# Altium PCB PCB2.PcbDoc
Units mil, origin at the board's own origin, x right, y up, seen from the top; angles counter-clockwise.
Board outline 2860 x 2955 mil, 2 copper layers (Top Layer, Bottom Layer); 7 components, 13 nets, 64 pads, 4 vias.
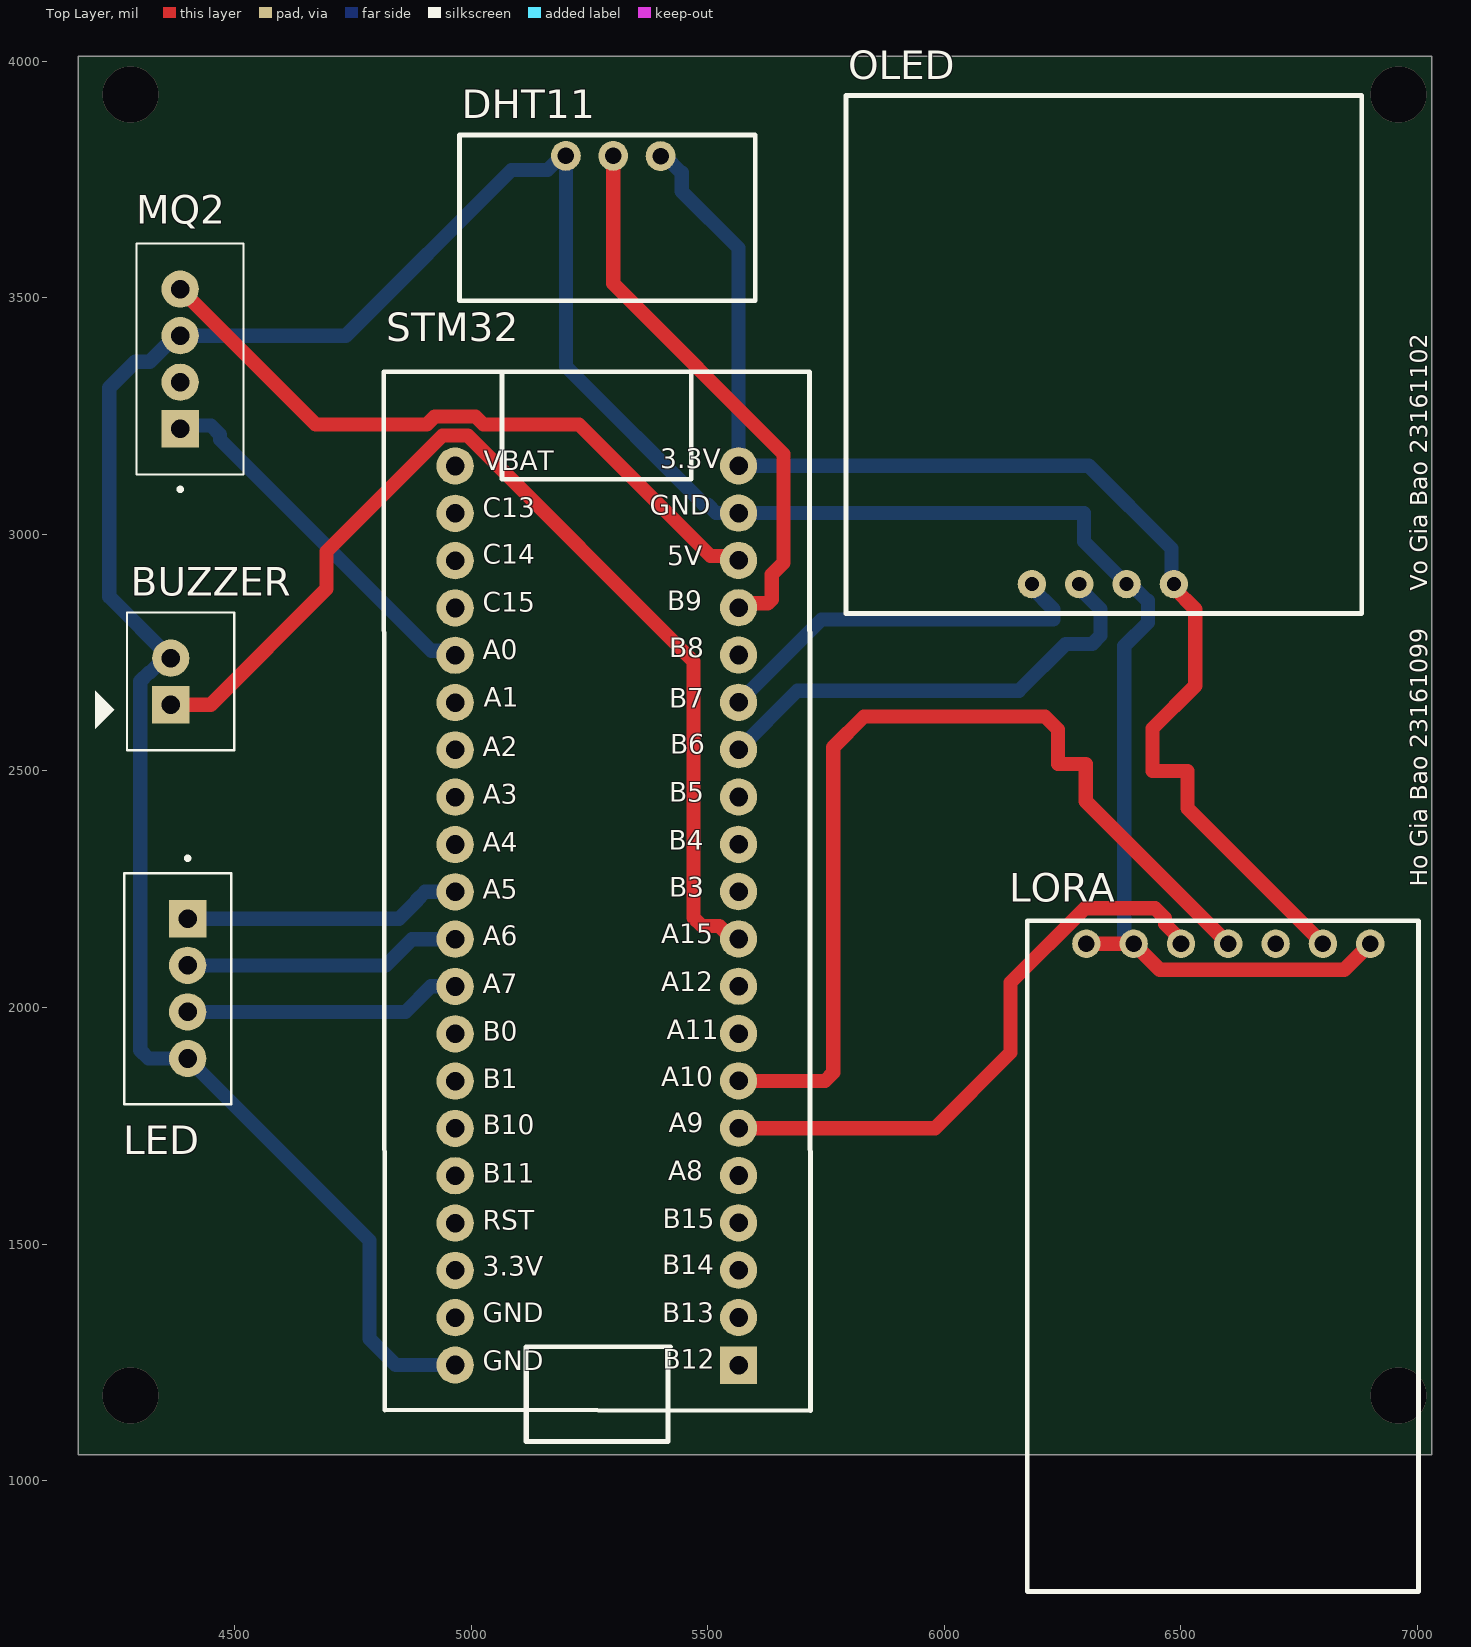
[diagram p0: Top Layer view]
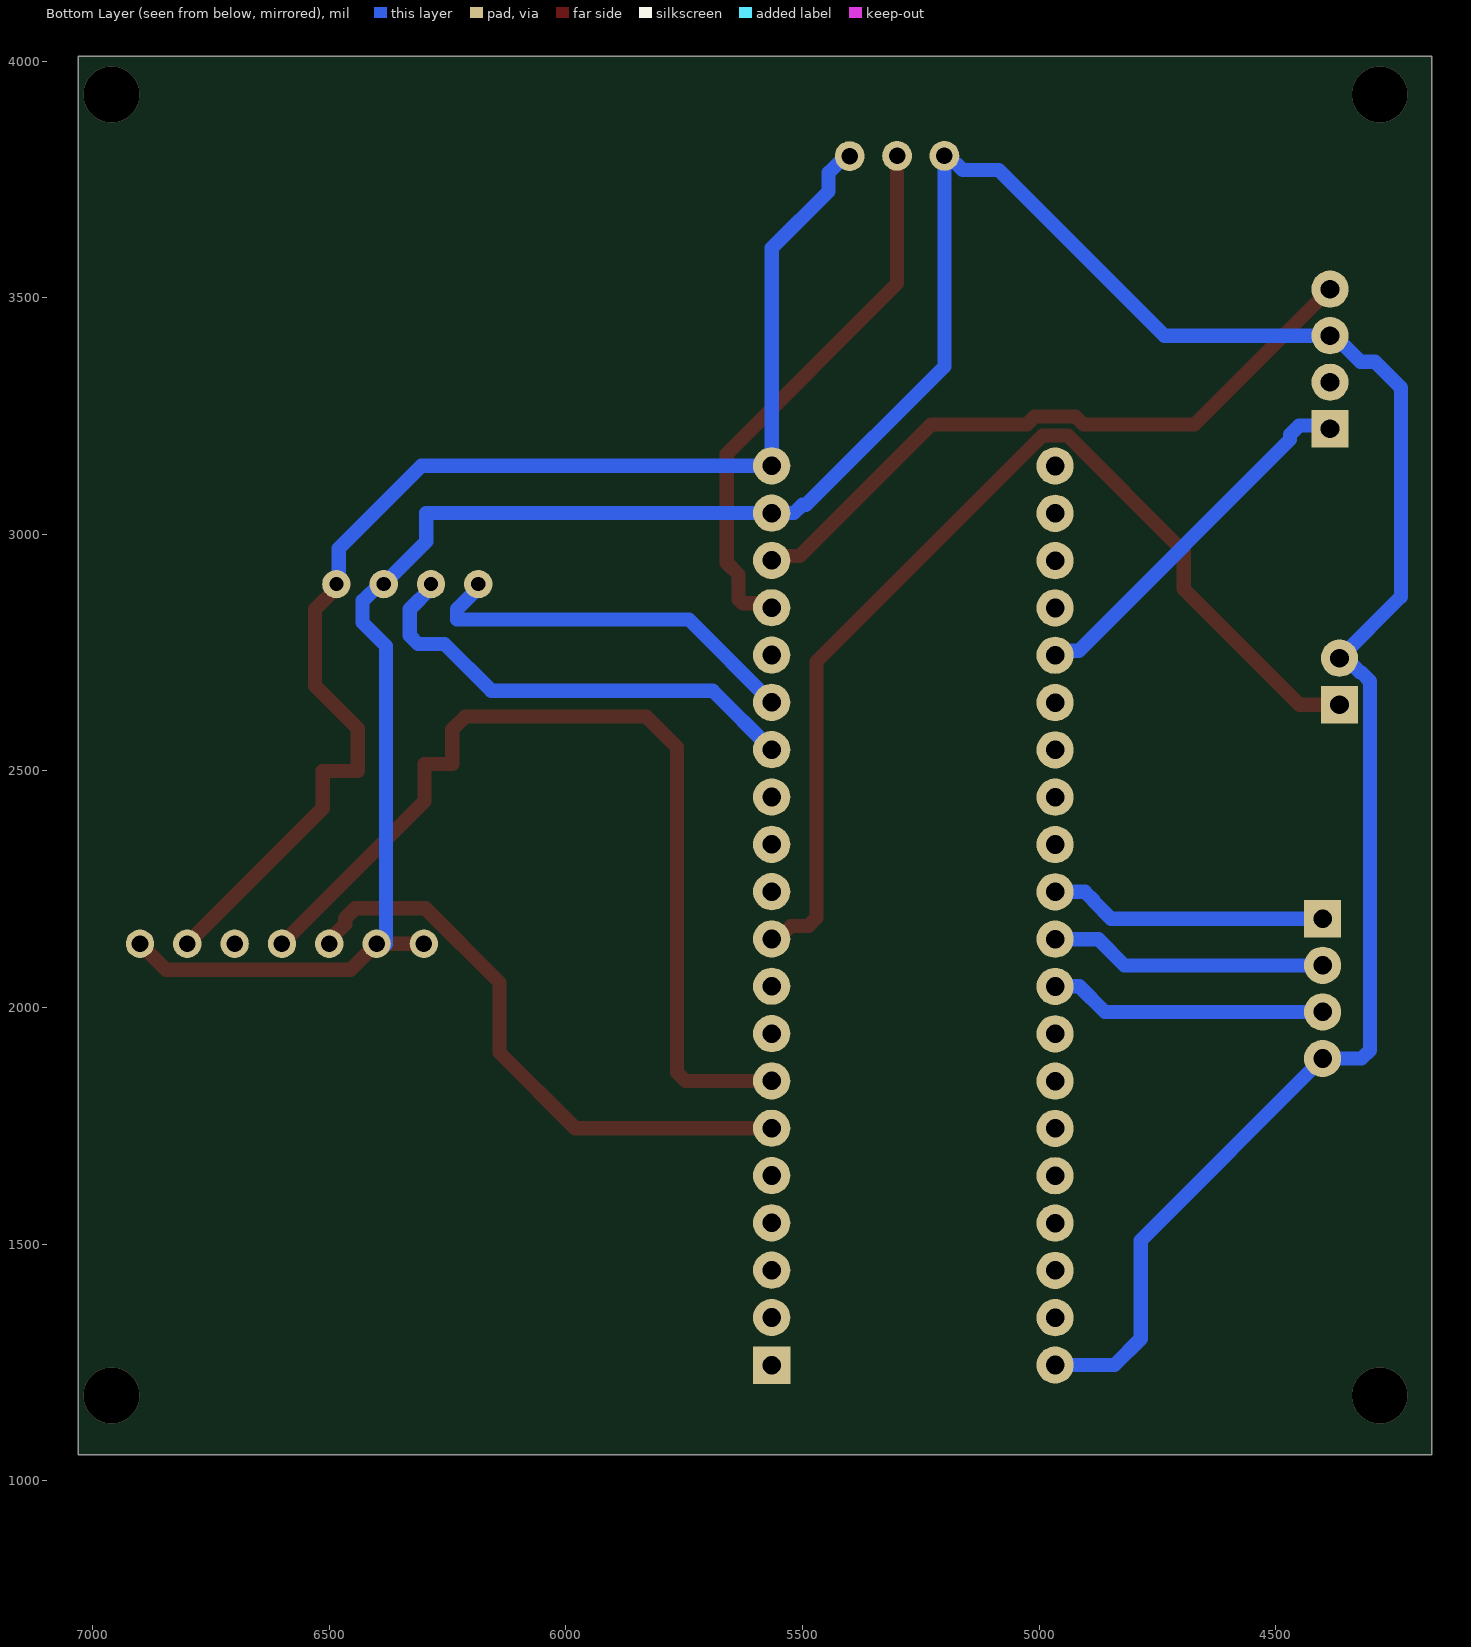
[diagram p1: Bottom Layer view, seen from below]

## Layer stack, top to bottom
Top Solder: solder mask 0.4, Solder Resist, Dk 3.5
Top Layer: signal copper 1.4
Dielectric 1: dielectric 12.6, FR-4, Dk 4.8
Bottom Layer: signal copper 1.4
Bottom Solder: solder mask 0.4, Solder Resist, Dk 3.5

## Board outline
4170,1055 7030,1055 7030,4010 4170,4010

## Design rules (kind name [scope] priority, off if disabled: settings)
Clearance [All] p1: gap=10 ignorepadtopadclearanceinfootprint=FALSE except(30: Arc-Fill Arc-Poly Arc-Region Track-Fill Track-Poly Track-Region SMDPad-Fill SMDPad-Poly SMDPad-Region THPad-Fill THPad-Poly THPad-Region Via-Fill Via-Poly Via-Region Fill-Fill Fill-Poly Fill-Region Poly-Poly Poly-Region Region-Region)
PolygonConnect [All] p1: connectstyle=Relief reliefconductorwidth=10 reliefentries=4 polygonreliefangle="90 Angle" airgapwidth=10
RoutingVias [All] p1: holewidth=28 width=50 viastyle="Through Hole" minholewidth=28 minwidth=50 maxholewidth=28 maxwidth=50
SolderMaskExpansion [All] p1: expansion=4 istentingtop=FALSE
Width [All] p1: maxlimit=150 minlimit=28 preferedwidth=30
30 further rules are at their usual default settings.

## Components (designator, comment, footprint, x,y, rotation, side; value= is the part's Value field where it differs from the comment)
BUZZER "Buzzer" speaker 4385.67,2689.21 r270 top
DHT11 "DHT11" DHT11_KIT 5400.42,3794 r180 top
LED "Dht22" JST_B4B-XH-A 4380,2040 r90 top
LORA "E32-433T20D" LORA_E32 6300,2135 r90 top
MQ2 "MQ2-MOD" JST_B4B-XH-A 4405.67,3370.79 r270 top
OLED "OLED SSD1306" OLED 6485,2895 r180 top
STM32 "STM32F103C8T6" "Stm32 BluePill" 5565,1244 r0 top

## Footprints (in the part's own frame and the unit in brackets; to place one, negate y for a bottom-side part, rotate by r counter-clockwise, add the part's x,y. Pads: shape width x height; smd on the part's side, far side on the other; paste and mask are expansions set on the pad)
DHT11_KIT [mil]
  round 62.99 hole 35: 1(0.21,-5.5) 2(100.42,-6) 3(200.42,-6)
  silkscreen extent -200,-50 425,300, body extent -203,-44 427,290, height 867
JST_B4B-XH-A [mm]
  rect 2x2 hole 1: 1(3.75,-0.525)
  round 2 hole 1: 2(1.25,-0.525) 3(-1.25,-0.525) 4(-3.75,-0.525)
  silkscreen extent -6.2,-2.88 7.1,2.88, body extent -6.2,-2.88 6.2,2.88, height 7
LORA_E32 [mil]
  round 60 hole 35: 1(0,0) 2(0,-100) 3(0,-200) 4(0,-300) 5(0,-400) 6(0,-500) 7(0,-600)
  silkscreen extent -1369,-702 48,125, body extent -2134,-772 59,173, height 305
OLED [mil]
  round 60 hole 30: 11(0,0) 12(100,0) 13(200,0) 14(300,0)
  silkscreen extent -397,-1032 693,62, body extent -342,-1016 642,55, height 106
speaker [mm]
  rect 2x2 hole 1: 1(1.25,-0.525)
  round 2 hole 1: 2(-1.25,-0.525)
  silkscreen extent -3.7,-4.57 3.7,2.88, body extent -3.7,-2.88 3.7,2.88, height 7
"Stm32 BluePill" [mm]
  rect 2x2 hole 1: 1(0,0)
  round 2 hole 1: 2(0,2.565) 3(0,5.105) 4(0,7.645) 5(0,10.185) 6(0,12.725) 7(0,15.265) 8(0,17.805) 9(0,20.345) 10(0,22.885) 11(0,25.425) 12(0,27.965) 13(0,30.505) 14(0,33.045) 15(0,35.585) 16(0,38.125) 17(0,40.665) 18(0,43.205) 19(0,45.745) 20(0,48.285) 21(-15.215,48.275) 22(-15.215,45.735) 23(-15.215,43.195) 24(-15.215,40.655) 25(-15.215,38.115) 26(-15.215,35.575) 27(-15.215,33.035) 28(-15.215,30.495) 29(-15.215,27.955) 30(-15.215,25.415) 31(-15.215,22.875) 32(-15.215,20.335) 33(-15.215,17.795) 34(-15.215,15.255) 35(-15.215,12.715) 36(-15.215,10.175) 37(-15.215,7.635) 38(-15.215,5.095) 39(-15.215,2.555) 40(-15.215,0.015)
  silkscreen extent -19.05,-4.09 3.87,53.34, body extent -19,-3.37 3.86,54.19, height 12.31

## Part data
LED: "Header, 4-Pin", LatestRevisionDate=17-Jul-2002, LatestRevisionNote="Re-released for DXP Platform.", Publisher="Altium Limited"
LORA: library part "Lora E32-433T20D"
MQ2: Manufacturer="W¨¹rth Elektronik eiSos GmbH", partNo=613004143121, ComponentLink1 Description=Manufacturer, ComponentLink1URL=http://www.we-online.com, ComponentLink2 Description=Datasheet, ComponentLink2URL=http://katalog.we-online.de/em/datasheet/6130xx143121.pdf, Created by="Karrer Zheng", Created Date="29 March 2013", NoPins=04
OLED: library part SSD1306
STM32: library part BluePill, "Designed By @Alixahedi"

## Via types
v1: diameter 118.11/118.11 (per signal layer), hole 118.11, Top Layer to Bottom Layer, 2 vias
v2: diameter 118.11, hole 118.11, Top Layer to Bottom Layer, 2 vias

## Nets (pads, with @x,y where several pads share a name; then routed paths per layer and width w, separated by ;. In a path a pad name is that pad's centre, name@x,y a point inside that pad or via, vN(x,y) a via of type N, cw(c..) or ccw(c..) an arc to the next point about the centre after c; other vN are vias at no path point)
3.3V: DHT11.1 LORA.6 OLED.11 STM32.20 | length 2809.8
  Top Layer w30: OLED.11 6485,2886.88 6530,2841.88 6530,2680 6440,2590 6440,2500 6513.85,2500 6513.85,2421.15 LORA.6
  Bottom Layer w30: DHT11.1 5409.14,3799.5 5443.64,3765 5445,3765 5445,3725 5565,3605 STM32.20 6305,3145 6480,2970 6480,2900 OLED.11 OLED.11@6485,2886.88
5V: MQ2.4 STM32.18 | length 1431.5
  Top Layer w30: MQ2.4 4671.38,3232.05 4905.88,3232.05 4922.77,3248.94 5009.23,3248.94 5026.12,3232.05 5227.95,3232.05 5505.67,2954.33 5555.67,2954.33 STM32.18
A0: MQ2.1 STM32.25 | length 822.6
  Bottom Layer w30: MQ2.1@4407.52,3200.63 MQ2.1 4391.85,3230 4450,3230 4469.37,3210.63 4469.37,3200.63 4916.1,2753.9 4956.67,2753.9 STM32.25
Buzzer: BUZZER.1 STM32.10 | length 2240
  Top Layer w30: BUZZER.1 4449.37,2640 4694.35,2884.98 4694.35,2963.96 4939.34,3208.94 4992.66,3208.94 5470,2731.61 5470,2190 5487.57,2172.43 5512.43,2172.43 5512.57,2172.57 5524.24,2172.57 5551.81,2145 STM32.10
DATA: DHT11.2 STM32.17 | length 1174.2
  Top Layer w30: DHT11.2 5300,3530 5660,3170 5660,2940 5635,2915 5635,2862.57 5626.75,2854.33 5574.33,2854.33 STM32.17
GND: BUZZER.2 DHT11.3 LED.4 LORA.1 LORA.2 LORA.7 MQ2.3 OLED.12 STM32.19 STM32.40 | length 7033.5
  Top Layer w30: LORA.1 LORA.2 6455,2080 6845,2080 LORA.7
  Bottom Layer w30: STM32.40@4962.2,1248.37 STM32.40 4840.43,1244.57 4785,1300 4785,1508.03 LED.4 4318.2,1892.36 4300.63,1909.94 4300.63,2689.73 4318.79,2707.89 4321.27,2707.89 4351.81,2738.43 BUZZER.2 4235,2868.43 4235,3310 4290,3365 4320.68,3365 4375.68,3420 MQ2.3 4735,3420 5085,3770 5161.07,3770 5191.07,3800 DHT11.3 5200,3355 5492.43,3062.57 5500,3062.57 5517.57,3045 STM32.19 6295,3045 6295,2985 OLED.12 6393.12,2895 6428.12,2860 6430,2860 6430,2813.93 6380,2763.93 LORA.2@6380,2133.85
LED1: LED.1 STM32.30 | length 603.3
  Bottom Layer w30: LED.1 4847.64,2187.64 4885,2225 4885,2227 4902.57,2244.57 STM32.30 STM32.30@4956.67,2235.25
LED2: LED.2 STM32.31 | length 588.3
  Bottom Layer w30: LED.2 4819.21,2089.21 4874.57,2144.57 STM32.31
LED3: LED.3 STM32.32 | length 601.2
  Bottom Layer w30: LED.3 4860.79,1990.79 4915,2045 4965.57,2045 STM32.32 STM32.32@4956.67,2035.25
RX: LORA.3 STM32.6 | length 1257
  Top Layer w30: STM32.6 5980,1745 6140,1905 6140,2052.78 6297.22,2210 6445,2210 6466.21,2188.79 6466.21,2176.9 6500,2143.12 LORA.3
SCL: OLED.13 STM32.14 | length 992.4
  Bottom Layer w30: STM32.14 5689.76,2669.76 6157.55,2669.76 6256.39,2768.61 6312.43,2768.61 6330,2786.18 6330,2841.88 6285,2886.88 OLED.13
SDA: OLED.14 STM32.15 | length 831.1
  Bottom Layer w30: STM32.15 5740,2820 6230,2820 6230,2841.88 6185,2886.88 OLED.14
TX: LORA.4 STM32.7 | length 2044.1
  Top Layer w30: STM32.7 5747.43,1845 5765,1862.57 5765,2550 5830,2615 6212.43,2615 6240,2587.43 6240,2515 6298.85,2515 6298.85,2436.15 LORA.4
pads on no net: LORA.5 MQ2.2 STM32.1 STM32.2 STM32.3 STM32.4 STM32.5 STM32.8 STM32.9 STM32.11 STM32.12 STM32.13 STM32.16 STM32.21 STM32.22 STM32.23 STM32.24 STM32.26 STM32.27 STM32.28 STM32.29 STM32.33 STM32.34 STM32.35 STM32.36 STM32.37 STM32.38 STM32.39
copper on no net:
  other v1: 4280,1180 6960,1180
  other v2: 4280,3930 6960,3930

## Silkscreen, mask and mechanical layers (free items; w line width, h text height)
Top Overlay:
  text "Ho Gia Bao 23161099     Vo Gia Bao 23161102" at 7020,2255 h36.61 r90

## Text inside footprints (layer, text, board x,y; h text height)
STM32: Top Overlay "5V" at 5414,2921.28 h70; Top Overlay "B9" at 5414,2826.28 h70; Top Overlay "B8" at 5419,2726.28 h70; Top Overlay "3.3V" at 5399,3126.28 h70; Top Overlay "GND" at 5376.8,3027.28 h70; Top Overlay "A5" at 5024,2216.28 h70; Top Overlay "A2" at 5024,2517.5 h70; Top Overlay "A3" at 5024,2417.28 h70; Top Overlay "A4" at 5024,2315.5 h70; Top Overlay "RST" at 5024,1516.28 h70; Top Overlay "B10" at 5024,1718.28 h70; Top Overlay "B11" at 5024,1616.5 h70; Top Overlay "A6" at 5024,2118.28 h70; Top Overlay "A7" at 5024,2016.5 h70; Top Overlay "B0" at 5024,1916.28 h70; Top Overlay "B1" at 5024,1815.5 h70; Top Overlay "3.3V" at 5024,1419.28 h70; Top Overlay "B15" at 5404.4,1520.28 h70; Top Overlay "A8" at 5416.5,1621.28 h70; Top Overlay "A11" at 5413.2,1919.5 h70; Top Overlay "B3" at 5419,2220.28 h70; Top Overlay "A9" at 5417.7,1722.28 h70; Top Overlay "A15" at 5401.9,2122.28 h70; Top Overlay "A12" at 5401.9,2020.5 h70; Top Overlay "A10" at 5401.9,1820.28 h70; Top Overlay "VBAT" at 5026.86,3121.5 h70; Top Overlay "B5" at 5419,2421.28 h70; Top Overlay "B14" at 5403.2,1422.5 h70; Top Overlay "B7" at 5419,2619.5 h70; Top Overlay "B4" at 5417.7,2319.5 h70; Top Overlay "B6" at 5420.2,2522.28 h70; Top Overlay "C15" at 5024,2823.28 h70; Top Overlay "C13" at 5024,3022.28 h70; Top Overlay "C14" at 5024,2924.28 h70; Top Overlay "A0" at 5024,2722.28 h70; Top Overlay "A1" at 5026.8,2621.5 h70; Top Overlay "GND" at 5024,1321.28 h70; Top Overlay "B13" at 5404,1321.28 h70; Top Overlay "GND" at 5024,1220.28 h70; Top Overlay "B12" at 5404.4,1222.5 h70